# Altium PCB PCB1.PcbDoc
Units mm, origin at the board's own origin, x right, y up, seen from the top; angles counter-clockwise.
Board outline 99.82 x 77.22 mm, 2 copper layers (Top Layer, Bottom Layer); 41 components, 33 nets, 166 pads, 285 vias.
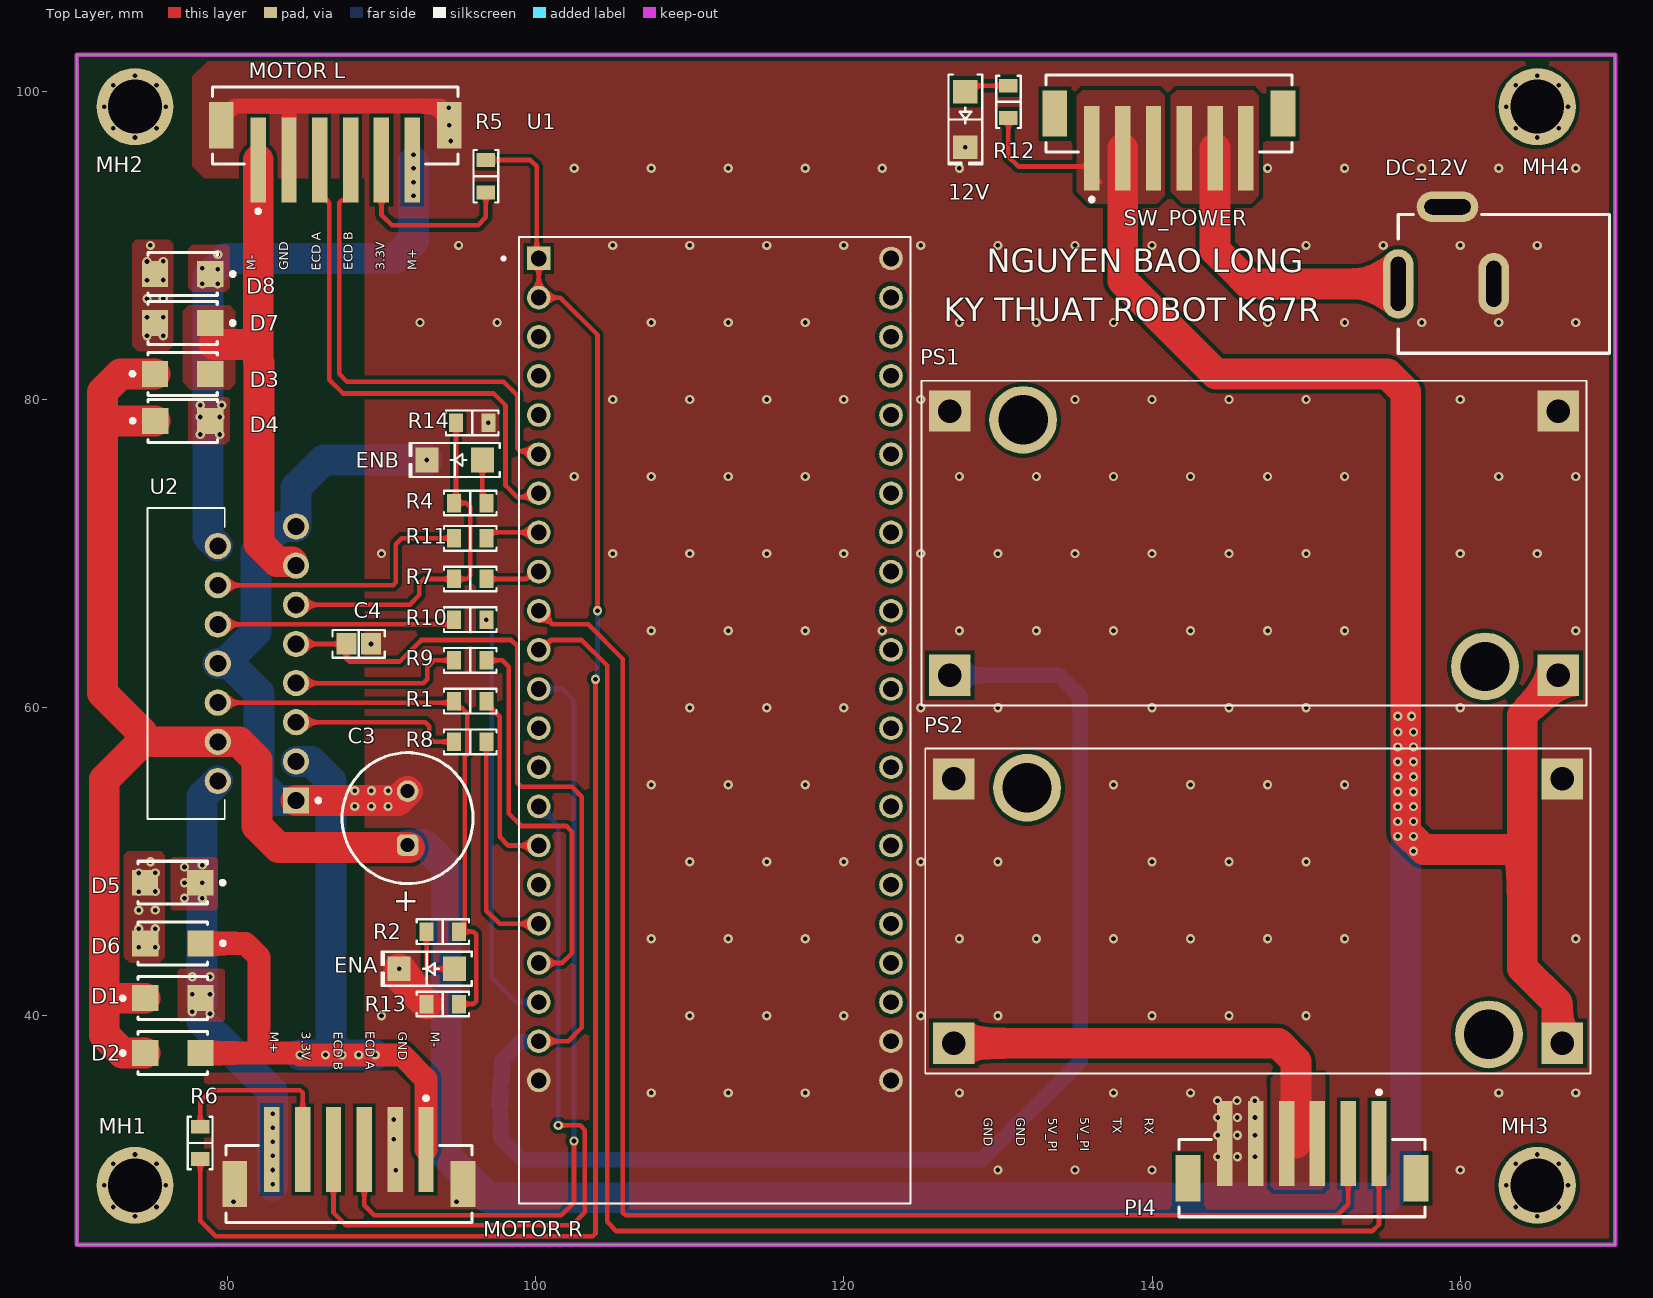
[diagram p0: Top Layer view]
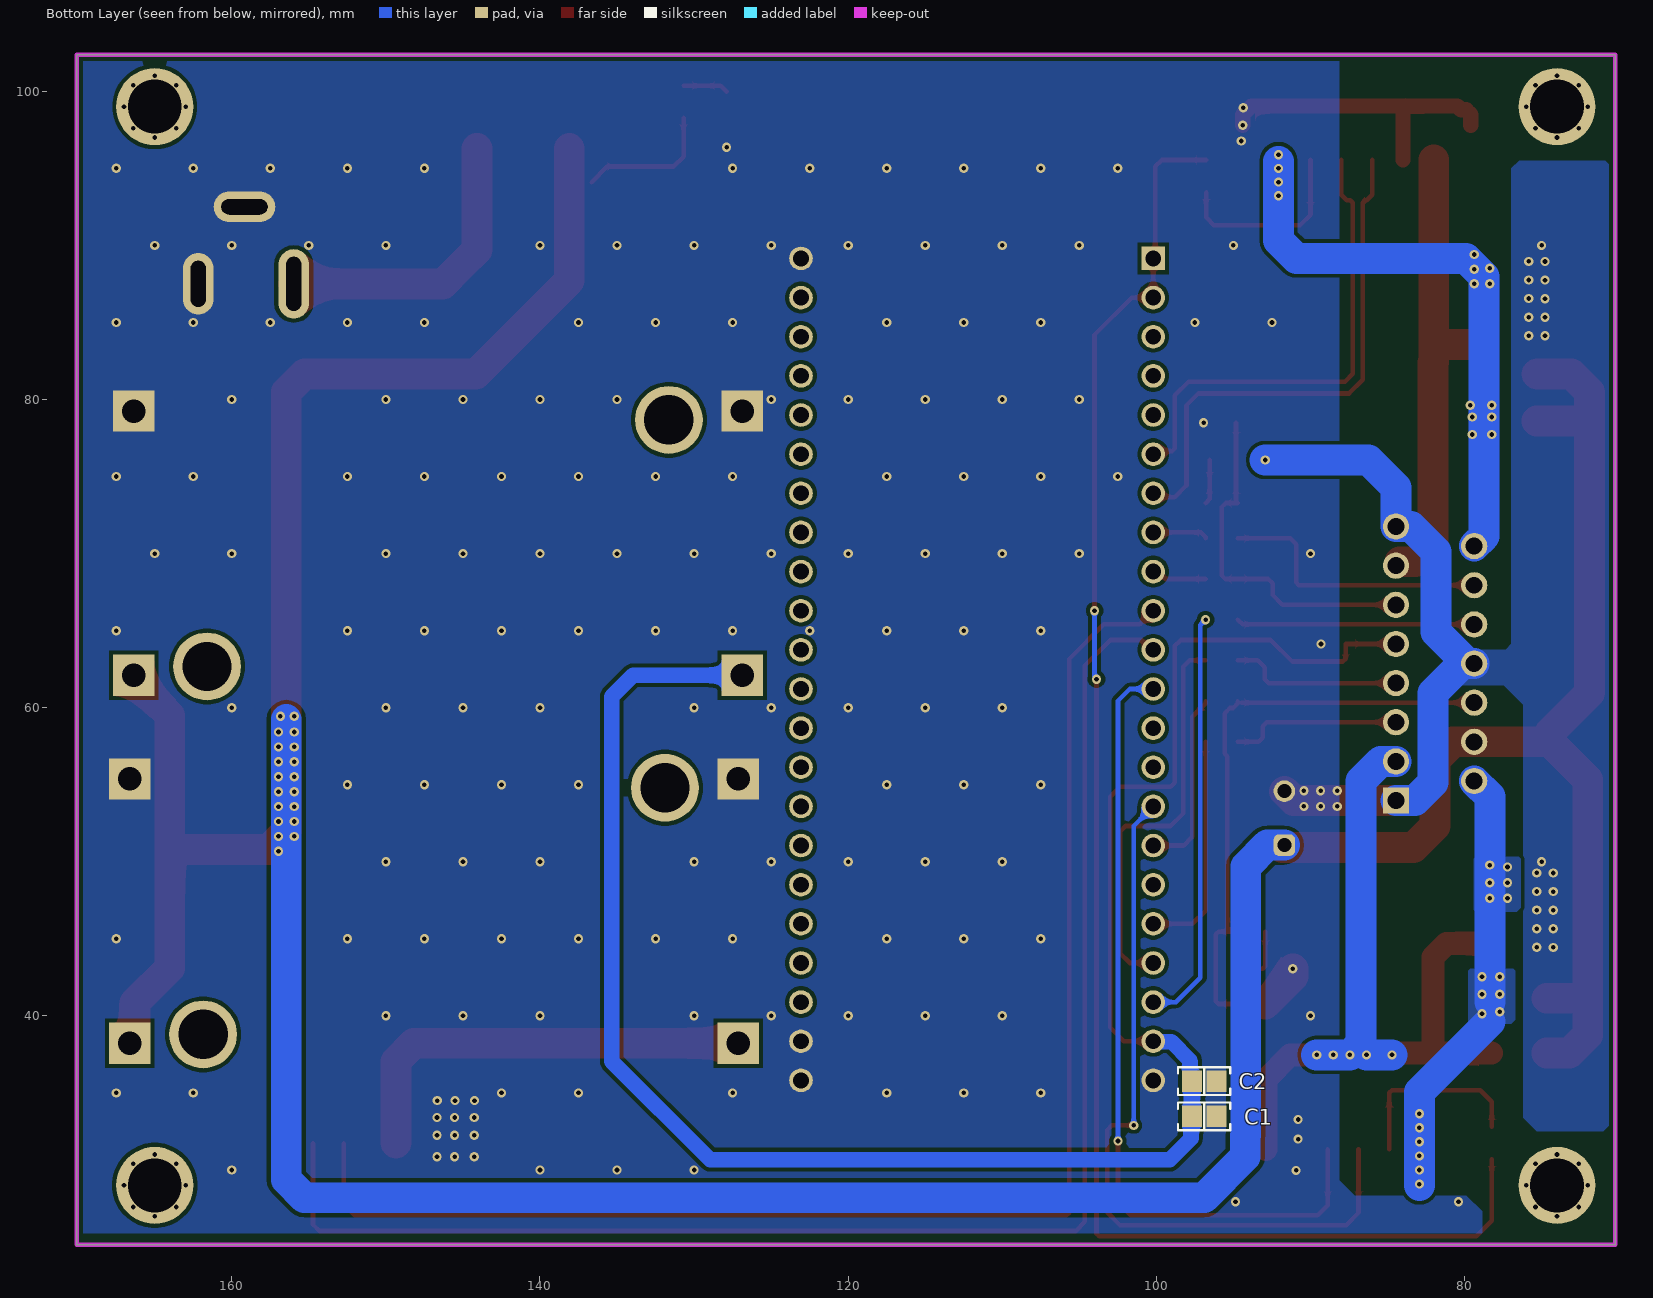
[diagram p1: Bottom Layer view, seen from below]
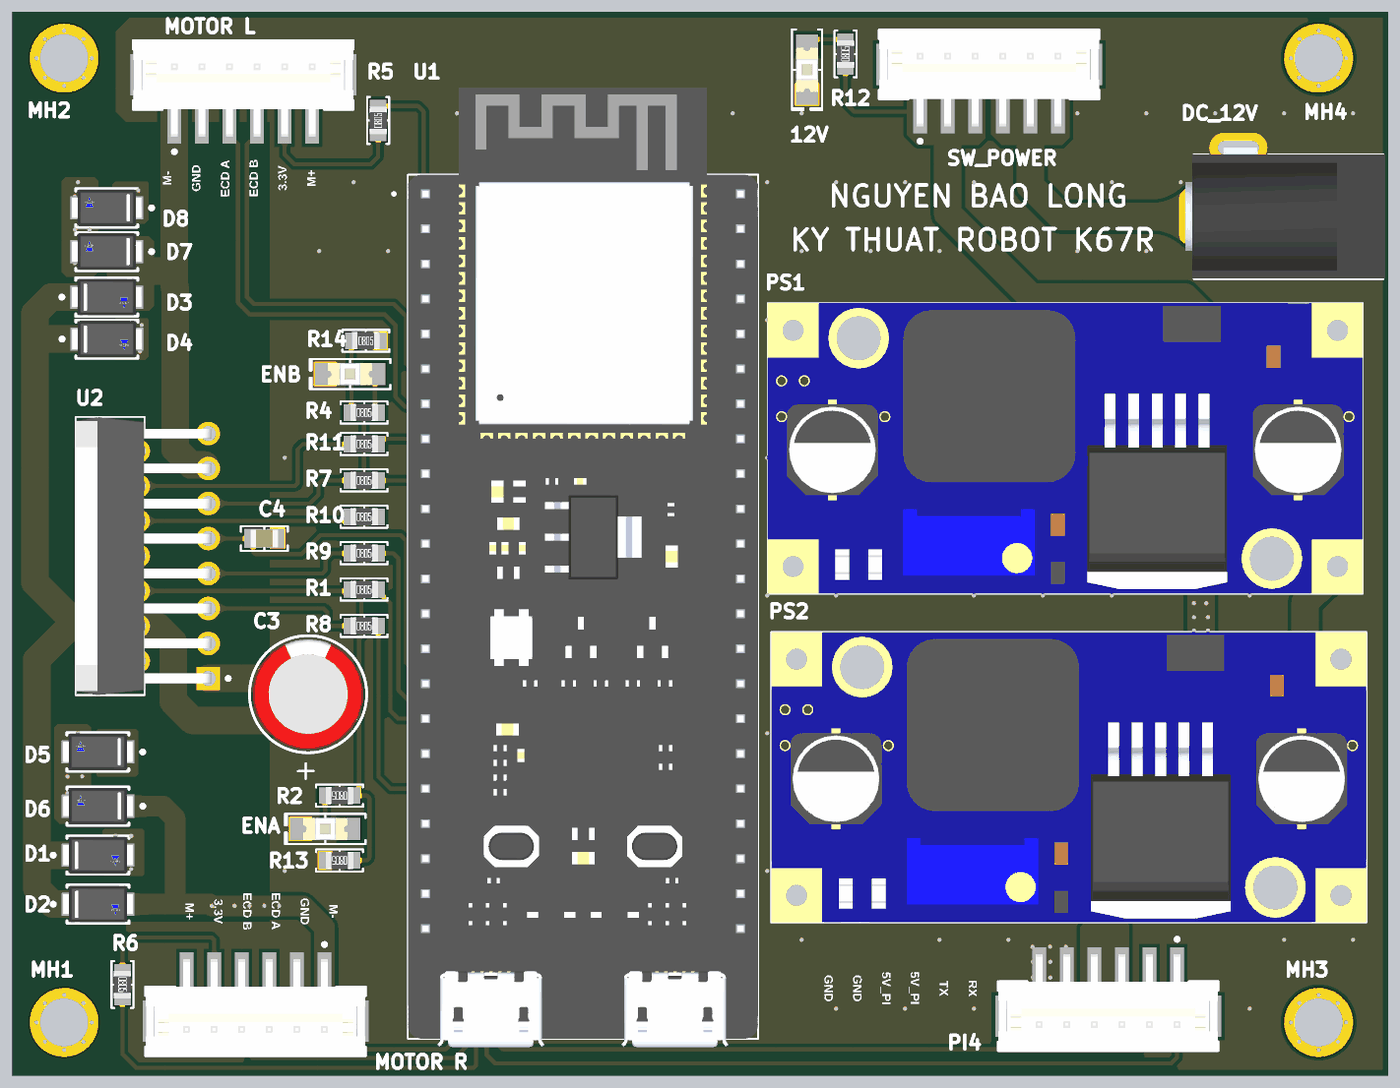
[diagram p2: 3D render of the assembled board from above, using the file's embedded part models]

## Layer stack, top to bottom
Top Solder: solder mask 0.0102, Solder Resist, Dk 3.5
Top Layer: signal copper 0.0356
Dielectric 1: dielectric 0.32, FR-4, Dk 4.8
Bottom Layer: signal copper 0.0356
Bottom Solder: solder mask 0.0102, Solder Resist, Dk 3.5

## Board outline
70.231,25.146 170.053,25.146 170.053,102.362 70.231,102.362

## Design rules (kind name [scope] priority, off if disabled: settings)
Clearance [All] p1: gap=0.254 ignorepadtopadclearanceinfootprint=FALSE
PolygonConnect [All] p1: connectstyle=Direct reliefconductorwidth=0.254 reliefentries=4 polygonreliefangle="90 Angle" airgapwidth=0.254
RoutingVias [All] p1: holewidth=0.711 width=1.27 viastyle="Through Hole" minholewidth=0.711 minwidth=1.27 maxholewidth=0.711 maxwidth=1.27
SolderMaskExpansion [All] p1: expansion=0.102 istentingtop=FALSE
SupplyNets "Schematic Supply Nets" [InNet('GND')] p1: voltage=0.000
Width [All] p1: maxlimit=2 minlimit=0.3 preferedwidth=0.5
30 further rules are at their usual default settings.

## Components (designator, comment, footprint, x,y, rotation, side; value= is the part's Value field where it differs from the comment)
12V "LED1206, Red" "LED 1206_3216 RED" 127.889,98.171 r270 top value=Red
C1 "1 µF" "CAP 0805_2012" 96.901,33.481 r0 bottom
C2 "1 µF" "CAP 0805_2012" 96.901,35.767 r0 bottom
C3 "870235174004" WCAP-PT5H_D8H11.5 91.694,52.832 r270 top
C4 "1 µF" "CAP 0805_2012" 88.519,64.135 r180 top
D1 "SS24SHE3_B/H" FP-95400-MFG 76.454,41.148 r0 top
D2 "SS24SHE3_B/H" FP-95400-MFG 76.454,37.592 r0 top
D3 "SS24SHE3_B/H" FP-95400-MFG 77.089,81.661 r0 top
D4 "SS24SHE3_B/H" FP-95400-MFG 77.101,78.613 r0 top
D5 "SS24SHE3_B/H" FP-95400-MFG 76.442,48.641 r180 top
D6 "SS24SHE3_B/H" FP-95400-MFG 76.454,44.704 r180 top
D7 "SS24SHE3_B/H" FP-95400-MFG 77.089,84.963 r180 top
D8 "SS24SHE3_B/H" FP-95400-MFG 77.089,88.138 r180 top
DC_12V "KLDX-0202-B" KYCN-KLDX-0202-B_V 169.679,87.503 r180 top
ENA "LED1206, Red" "LED 1206_3216 RED" 92.942,43.053 r180 top value=Red
ENB "LED1206, Red" "LED 1206_3216 RED" 94.742,76.073 r180 top value=Red
MH1 "Mounting Holes" "M3 (Small Vias)" 74,29 r0 top
MH2 "Mounting Holes" "M3 (Small Vias)" 74,99 r0 top
MH3 "Mounting Holes" "M3 (Small Vias)" 165,29 r0 top
MH4 "Mounting Holes" "M3 (Small Vias)" 165,99 r0 top
"MOTOR L" "B6B-PH-SM4-TBT(LF)(SN)" FP-B6B-PH-SM4-TBT_LF_SN-MFG 86.995,97.79 r0 top
"MOTOR R" "B6B-PH-SM4-TBT(LF)(SN)" FP-B6B-PH-SM4-TBT_LF_SN-MFG 87.884,29.083 r180 top
PI4 "B6B-PH-SM4-TBT(LF)(SN)" FP-B6B-PH-SM4-TBT_LF_SN-MFG 149.733,29.464 r180 top
PS1 "MC00100" CONV_MC00100 146.621,70.675 r180 top
PS2 "MC00100" CONV_MC00100 146.875,46.799 r180 top
R1 "0R, 0805" "YAGEO RES 0805_2012" 95.758,60.427 r0 top
R2 "3.3K, 0805" "YAGEO RES 0805_2012" 93.98,45.466 r180 top
R4 "3.3K, 0805" "YAGEO RES 0805_2012" 95.758,73.279 r0 top
R5 "0R, 0805" "YAGEO RES 0805_2012" 96.774,94.488 r90 top
R6 "0R, 0805" "YAGEO RES 0805_2012" 78.232,31.75 r270 top
R7 "0R, 0805" "YAGEO RES 0805_2012" 95.758,68.351 r0 top
R8 "0R, 0805" "YAGEO RES 0805_2012" 95.758,57.785 r0 top
R9 "0R, 0805" "YAGEO RES 0805_2012" 95.758,63.068 r0 top
R10 "0R, 0805" "YAGEO RES 0805_2012" 95.758,65.71 r0 top
R11 "0R, 0805" "YAGEO RES 0805_2012" 95.758,70.993 r0 top
R12 "3.3K, 0805" "YAGEO RES 0805_2012" 130.683,99.314 r90 top
R13 "10K, 0805" "YAGEO RES 0805_2012" 93.98,40.767 r180 top
R14 "10K, 0805" "YAGEO RES 0805_2012" 95.885,78.486 r0 top
SW_POWER "B6B-PH-SM4-TBT(LF)(SN)" FP-B6B-PH-SM4-TBT_LF_SN-MFG 141.097,98.552 r0 top
U1 "ESP32-S3-DEVKITC-1-N8R2" XCVR_ESP32-S3-DEVKITC-1-N8R2 111.633,59.182 r0 top
U2 "L298N" L298N_MFG 77.325,62.865 r90 top

## Footprints (in the part's own frame and the unit in brackets; to place one, negate y for a bottom-side part, rotate by r counter-clockwise, add the part's x,y. Pads: shape width x height; smd on the part's side, far side on the other; paste and mask are expansions set on the pad)
"CAP 0805_2012" [mm]
  rect 1.3x1.4 smd: 1(-0.8,0) 2(0.8,0)
  silkscreen extent -1.7,-0.9 1.7,0.9, body extent -1,-0.64 1,0.64, height 1.26
CONV_MC00100 [mil]
  rect 105.63x105.63 / inner round 105.63 / far side rect 105.63x105.63 hole 60 mask+4.02: IN+(-777.5,337.5) IN-(-777.5,-337.5) OUT+(777.5,337.5) OUT-(777.5,-337.5)
  round 173.23 hole 125.98 mask+4.02: MH1(-590,315) MH2(590,-315)
  silkscreen extent -850,-415 850,415, body extent -850,-415 850,415, height 551
FP-95400-MFG [mm]
  rect 1.7x1.68 smd paste+0 mask+0: 1(-1.79,0) 2(1.79,0)
  silkscreen extent -3.37,-1.4 2.25,1.4, body extent -2.74,-1.5 2.74,1.5, height 0.25
FP-B6B-PH-SM4-TBT_LF_SN-MFG [mm]
  rect 1x5.5 smd paste+0 mask+0: 1(-5,-2.25) 2(-3,-2.25) 3(-1,-2.25) 4(1,-2.25) 5(3,-2.25) 6(5,-2.25)
  rect 1.6x3 smd paste+0 mask+0: 7(-7.4,0) 8(7.4,0)
  silkscreen extent -7.98,-5.7 7.98,2.5, body extent -7.98,-4.5 7.98,2.5, height 6.6
KYCN-KLDX-0202-B_V [mm] "3 Conductor Jack, 9 x 14.5 mm Body"
  oval 2x4.5 hole 1 slot 3.5 at 90 deg: 1(13.7,0)
  oval 2x4 hole 1 slot 3 at 90 deg: 2(7.5,0)
  oval 4x2 hole 1 slot 3 at 0 deg: 3(10.5,-5)
  silkscreen extent 0,-4.5 13.7,4.5, body extent -0.15,-5 14.35,4.5, height 11
L298N_MFG [mm] "Recommended Land Pattern"
  rect 1.7x1.7 hole 1.1 paste-2539.97 mask+0: 1(-8.89,-7.13)
  round 1.7 hole 1.1 paste-2539.97 mask+0: 2(-7.62,-2.05) 3(-6.35,-7.13) 4(-5.08,-2.05) 5(-3.81,-7.13) 6(-2.54,-2.05) 7(-1.27,-7.13) 8(0,-2.05) 9(1.27,-7.13) 10(2.54,-2.05) 11(3.81,-7.13) 12(5.08,-2.05) 13(6.35,-7.13) 14(7.62,-2.05) 15(8.89,-7.13)
  silkscreen extent -10.1,-8.7 10.1,2.5, body extent -10.1,-7.39 10.1,2.5, height 21
"LED 1206_3216 RED" [mm]
  rect 1.5x1.6 smd: 1(-1.8,0) 2(1.8,0)
  silkscreen extent -2.92,-1.1 2.92,1.1, body extent -1.6,-0.8 1.6,0.8, height 0.9
"M3 (Small Vias)" [mm]
  round 5 hole 3.5: 1(0,0)
WCAP-PT5H_D8H11.5 [mm] "Aluminum Polymer Capacitors, body Diameter 8mm"
  rrect50% 1.4x1.4 hole 0.9: 1(1.75,0)
  round 1.4 hole 0.9: 2(-1.75,0)
  silkscreen extent -4.25,-4.25 4.25,4.25, body extent -3.99,-4 4,4, height 11.81
XCVR_ESP32-S3-DEVKITC-1-N8R2 [mm]
  rect 1.53x1.53 / inner round 1.53 / far side rect 1.53x1.53 hole 1.02: J1_1(-11.43,29.97)
  round 1.53 hole 1.02: J1_2(-11.43,27.43) J1_3(-11.43,24.89) J1_4(-11.43,22.35) J1_5(-11.43,19.81) J1_6(-11.43,17.27) J1_7(-11.43,14.73) J1_8(-11.43,12.19) J1_9(-11.43,9.65) J1_10(-11.43,7.11) J1_11(-11.43,4.57) J1_12(-11.43,2.03) J1_13(-11.43,-0.51) J1_14(-11.43,-3.05) J1_15(-11.43,-5.59) J1_16(-11.43,-8.13) J1_17(-11.43,-10.67) J1_18(-11.43,-13.21) J1_19(-11.43,-15.75) J1_20(-11.43,-18.29) J1_21(-11.43,-20.83) J1_22(-11.43,-23.37) J3_1(11.43,29.97) J3_2(11.43,27.43) J3_3(11.43,24.89) J3_4(11.43,22.35) J3_5(11.43,19.81) J3_6(11.43,17.27) J3_7(11.43,14.73) J3_8(11.43,12.19) J3_9(11.43,9.65) J3_10(11.43,7.11) J3_11(11.43,4.57) J3_12(11.43,2.03) J3_13(11.43,-0.51) J3_14(11.43,-3.05) J3_15(11.43,-5.59) J3_16(11.43,-8.13) J3_17(11.43,-10.67) J3_18(11.43,-13.21) J3_19(11.43,-15.75) J3_20(11.43,-18.29) J3_21(11.43,-20.83) J3_22(11.43,-23.37)
  silkscreen extent -13.82,-31.37 12.7,31.37, body extent -12.7,-31.96 12.7,37.68, height 7.39
"YAGEO RES 0805_2012" [mm]
  rect 0.9x1.2 smd: 1(-1.05,0) 2(1.05,0)
  silkscreen extent -1.7,-0.8 1.7,0.8, body extent -1,-0.62 1,0.63, height 0.6

## Part data
12V ENA ENB: library part 5990210007F, "LED RED 1206 SMD", Color=Red, Current - Test=20mA, Device Package="1206 (3216 Metric)", Lens Color=0.80mm, Manufacturer=Dialight, Millicandela Rating=29mcd, Supplier Device Package=1206, Supplier Part Number 1=350-4360-1-ND, Voltage - Forward (Vf) (Typ)=2.1V, ComponentLink1Description=Datasheet, ComponentLink1URL=http://www.dialightsignalsandcomponents.com/Assets/Brochures_And_Catalogs/Indication/CBI_SMD_new/Dialight_CBI_data_599-1206_Apr2018.pdf, componentlink2description="DigiKey Link", ComponentLink2URL=https://www.digikey.com/en/products/detail/dialight/5990210007F/9385415, Configuration=Standard, Height (Max)=0.80mm, lastupdated="6/3/2024 8:00:41 PM", Lens Size="2.00mm x 1.60mm", Lens Style="Rectangle with Flat Top", Lifecycle Status=Active, Minimum Order=1, Mounting Type="Surface Mount", Package / Case="1206 (3216 Metric)", Packaging=TapeAndReel, Part Number=5990210007F, Part Status=Active, partid=188, Price=0.04, Series=599, Size / Dimension="3.20mm L x 1.60mm W", Supplier 1=DigiKey, Viewing Angle=140°, Wavelength - Dominant=633nm
C1 C2 C4: library part CC0805KKX7R9BB105, "CAP CER 1UF 50V X7R 0805", Capacitance="1 µF, 0805", Device Package="0805 (2012 Metric)", Manufacturer=Yageo, Operating Temperature="-55°C ~ 125°C", Supplier Part Number 1=311-1886-1-ND, Temperature Coefficient=X7R, Tolerance=±10%, Voltage - Rated=50V, Applications="General Purpose", ComponentLink1Description=Datasheet, ComponentLink1URL=https://www.yageo.com/upload/media/product/productsearch/datasheet/mlcc/UPY-GPHC_X7R_6.3V-to-50V_18.pdf, componentlink2description="DigiKey Link", ComponentLink2URL=https://www.digikey.com/en/products/detail/yageo/CC0805KKX7R9BB105/5195292, lastupdated="2/9/2024 8:15:50 PM", Lifecycle Status=Active, Minimum Order=1, Mounting Type="Surface Mount, MLCC", Package / Case="0805 (2012 Metric)", Packaging=TapeAndReel, Part Number=CC0805KKX7R9BB105, Part Status=Active, partid=9887, Price=0.03, Series=CC, Size / Dimension="0.079\" L x 0.049\" W (2.00mm x 1.25mm)", Supplier 1=DigiKey, Thickness (Max)="0.057\" (1.45mm)"
C3: library part CMP-03913-54202634-2, "WCAP-PT5H Aluminum Polymer Capacitors", Capacitance=680µF, Case/Package=Radial, ESR (Equivalent Series Resistance)=7mΩ, Leakage Current=428µA, Manufacturer Lifecycle Status=ACTIVE, Max Operating Temperature=105°C, Min Operating Temperature=-55°C, Ripple Current=6.1A, Tolerance=20%, Voltage Rating=6.3V, Diameter=8mm, Height - Seated (Max)=13.0048mm, Lead Pitch=3.5052mm, Length=11.5mm, Life (Hours)=5000hours, Lifecycle Status=Production, Mount="Through Hole", Packaging="Tape & Box (TB)", Pitch=3.5mm, Polarity=Polar, REACH SVHC=Unknown, RoHS=Compliant, Voltage Rating (DC)=6.3V, YEOL="1 = Estimated lifetime > 10 years"
D1 D2 D3 D4 D5 D6 D7 D8: library part CMP-02539-000047-1, "DIODE SCHOTTKY 2A 40V DO-214AC", RoHS Compliant=Yes
DC_12V: library part CMP-0256-00001-1, "3 Conductor Power Jack, 2 break 2 aux contacts", ComponentLink1Description="Manufacturer URL", ComponentLink1URL=http://kycon.com/, componentlink2description=Datasheet, ComponentLink2URL=http://anacapa.kycon.com/Catalog_PDF/KLDX_0202.pdf, Contact Finish=Brass, Mounting Technology="Through Hole", PackageDescription="Jack, 9 x 14.5 mm Body, 2.5 mm Center Pin Diameter", PackageReference=KLDX-0202-B, PartNumber=KLDX-0202-B
"MOTOR L" "MOTOR R" PI4 SW_POWER: library part CMP-17439-000069-1, "CONN HEADER SMD 6POS 2MM", Manufacturer=JST, Lead Free="Lead Free", Manufacturer Part Number=B6B-PH-SM4-TBT(LF)(SN), Mount="Surface Mount", Number of Positions=6, Pitch=2mm, Termination=Crimp
PS1 PS2: "DC-DC LM2596 Step Down Adjustable Converter Power Supply Module 1.3V-35V", Package=None, Check_prices=https://www.snapeda.com/parts/MC00100/YKS/view-part/?ref=eda, MF=YKS, MP=MC00100, SnapEDA_Link=https://www.snapeda.com/parts/MC00100/YKS/view-part/?ref=snap
R1 R5 R6 R7 R8 R9 R10 R11: library part RC0805FR-07470RL_3, "RES 0 OHM 1% 1/8W 0805", Device Package="0805 (2012 Metric)", Manufacturer=Yageo, Operating Temperature="-55°C ~ 155°C", Part Number=RC0805FR-07470RL, Power (Watts)="0.125W, 1/8W", Resistance="470 Ohms", Supplier Device Package=0805, Supplier Part Number 1=311-470CRCT-ND, Temperature Coefficient=±100ppm/°C, Tolerance=±1%, ComponentLink1Description=Datasheet, ComponentLink1URL=https://www.yageo.com/upload/media/product/productsearch/datasheet/rchip/PYu-RC_Group_51_RoHS_L_10.pdf, componentlink2description="DigiKey Link", ComponentLink2URL=https://www.digikey.com/en/products/detail/yageo/RC0805FR-07470RL/727976, Composition="Thick Film", Features="Moisture Resistant", Height - Seated (Max)="0.024\" (0.60mm)", lastupdated="7/25/2024 9:20:22 AM", Lifecycle Status=Active, Minimum Order=1, Number of Terminations=2, Package / Case="0805 (2012 Metric)", Packaging=TapeAndReel, Part Status=Active, partid=39406, Price=0.01, Series=RC_L, Size / Dimension="0.079\" L x 0.049\" W (2.00mm x 1.25mm)", Supplier 1=DigiKey
R2 R4 R12 R13 R14: library part RC0805FR-07470RL, "RES 470 OHM 1% 1/8W 0805", Device Package="0805 (2012 Metric)", Manufacturer=Yageo, Operating Temperature="-55°C ~ 155°C", Power (Watts)="0.125W, 1/8W", Resistance="470 Ohms", Supplier Device Package=0805, Supplier Part Number 1=311-470CRCT-ND, Temperature Coefficient=±100ppm/°C, Tolerance=±1%, ComponentLink1Description=Datasheet, ComponentLink1URL=https://www.yageo.com/upload/media/product/productsearch/datasheet/rchip/PYu-RC_Group_51_RoHS_L_10.pdf, componentlink2description="DigiKey Link", ComponentLink2URL=https://www.digikey.com/en/products/detail/yageo/RC0805FR-07470RL/727976, Composition="Thick Film", Features="Moisture Resistant", Height - Seated (Max)="0.024\" (0.60mm)", lastupdated="7/25/2024 9:20:22 AM", Lifecycle Status=Active, Minimum Order=1, Number of Terminations=2, Package / Case="0805 (2012 Metric)", Packaging=TapeAndReel, Part Number=RC0805FR-07470RL, Part Status=Active, partid=39406, Price=0.01, Series=RC_L, Size / Dimension="0.079\" L x 0.049\" W (2.00mm x 1.25mm)", Supplier 1=DigiKey
U1: "WiFi Development Tools - 802.11 (Engineering Samples Only) ESP32-S3 General-Purpose Development Board, ESP32-S3-WROOM-1-N8R2, with Pin Header", Package=None, Check_prices=https://www.snapeda.com/parts/ESP32-S3-DEVKITC-1-N8R2/Espressif+Systems/view-part/?ref=eda, MF="Espressif Systems", MP=ESP32-S3-DEVKITC-1-N8R2, SnapEDA_Link=https://www.snapeda.com/parts/ESP32-S3-DEVKITC-1-N8R2/Espressif+Systems/view-part/?ref=snap
U2: library part CMP-2000-06526-2, "Motor Driver, DC Brush, Full Bridge, 4 Outputs, 4.8V to 46V Supply, 2A Out, Multiwatt-15", Collector Emitter Voltage (VCEO)=46V, Drain to Source Resistance=930mΩ, Max Collector Current=3A, Max Operating Temperature=150°C, Max Output Current=4A, Max Supply Voltage=7V, Min Operating Temperature=-40°C, Min Supply Voltage=4.5V, Min Supply Voltage (DC)=4.8V, Operating Supply Current=13mA, Operating Supply Voltage=5V, Output Current=2A, Quiescent Current=500mA, China RoHS=Non-Compliant, ComponentLink1Description="Manufacturer's Website", ComponentLink1URL=http://www.st.com, componentlink2description="Datasheet URL", ComponentLink2URL=https://www.st.com/content/ccc/resource/technical/document/datasheet/82/cc/3f/39/0a/29/4d/f0/CD00000240.pdf/files/CD00000240.pdf/jcr:content/translations/en.CD00000240.pdf, Height=10.7mm, Height - Seated (Max)=21mm, HelpURL=https://www.st.com/content/ccc/resource/technical/document/datasheet/82/cc/3f/39/0a/29/4d/f0/CD00000240.pdf/files/CD00000240.pdf/jcr:content/translations/en.CD00000240.pdf, Interface=Parallel, Lead Free="Lead Free", Length=19.6mm, Lifecycle Status=Production, Motor Type=Brushed, Mount="Through Hole", Number of Channels=2, Number of Circuits=2, Number of Drivers=2, Number of Outputs=4, Number of Pins=13, Number of Terminals=15, Number of Transmitters=2, Output Current per Channel=2A, Output Voltage=46V, Radiation Hardening=No, REACH SVHC=No, RoHS=Compliant, Schedule B="8542390000, 8542390000", Terminal Pitch=1.27mm, Width=5mm

## Via types
v1: diameter 0.6, hole 0.3, Top Layer to Bottom Layer, tented both sides, 253 vias
v2: diameter 0.3, hole 0.3, Top Layer to Bottom Layer, 32 vias

## Nets (pads, with @x,y where several pads share a name; then routed paths per layer and width w, separated by ;. In a path a pad name is that pad's centre, name@x,y a point inside that pad or via, vN(x,y) a via of type N, cw(c..) or ccw(c..) an arc to the next point about the centre after c; other vN are vias at no path point)
3.3V_MCU: R5.2 R6.2 U1.J1_1 U1.J1_2 | length 105.4
  Top Layer w0.3: R6.2 78.232,26.716 79.248,25.7 103.71,25.7 103.886,25.876 v1(103.886,61.849) ; R5.2 99.661,95.538 100.076,95.123 100.076,89.279 U1.J1_1 U1.J1_2 101.602,86.612 104.013,84.201 v1(104.013,66.294)
  Bottom Layer w0.3: v1(103.886,61.849) 103.886,61.93 104.013,62.057 v1(104.013,66.294)
5V_MCU: C1.2 C2.2 C4.2 PS1.OUT+ U1.J1_21 U2.9 | length 129.2
  Top Layer w0.3: U2.9 C4.2@87.668,64.135 ; C4.2 87.719,63.173 87.895,62.997 91.191,62.997 92.583,64.389 98.425,64.389 98.806,64.008 98.806,55.118 99.06,54.864 102.362,54.864 102.997,54.229 102.997,39.243 102.106,38.352 U1.J1_21
  Bottom Layer w1: U1.J1_21 100.174,38.323 99.029,38.323 97.823,37.117 97.823,35.889 C2.2 C1.2 97.743,33.439 97.743,32.051 99.129,30.665 128.963,30.665 135.344,37.046 135.344,60.716 133.956,62.103 PS1.OUT+
5V_PI: PI4.3 PI4.4 PS2.OUT+ | length 28
  Top Layer w2: PS2.OUT+ 148.18,38.227 149.352,37.055 149.352,31.75
ENA: R1.1 R2.1 R13.1 U2.6 | length 37.6
  Top Layer w0.3: U2.6 R1.1@94.488,60.325 ; R1.1 94.708,60.277 95.008,59.977 95.224,59.977 95.562,59.639 95.562,57.018 95.4,56.856 95.4,45.616 95.18,45.616 R2.1 95.963,45.466 96.139,45.29 96.139,40.943 95.963,40.767 R13.1
ENB: R4.1 R7.1 R14.1 U2.11 | length 23.4
  Top Layer w0.3: U2.11 91.821,66.675 92.456,67.31 92.456,68.072 92.735,68.351 R7.1 95.529,68.351 95.758,68.58 95.758,73.025 95.504,73.279 R4.1 94.835,73.406 R14.1
GND: 12V.2 "MOTOR L.2" "MOTOR L.7" "MOTOR L.8" "MOTOR R.2" "MOTOR R.7" "MOTOR R.8" C1.1 C2.1 C3.2 C4.1 D5.2 D6.2 D7.2 D8.2 DC_12V.2 DC_12V.3 ENA.2 ENB.2 PI4.5 PI4.6 PS1.IN- PS1.OUT- PS2.IN- PS2.OUT- R13.2 R14.2 U1.J1_22 U1.J3_1 U1.J3_21 U1.J3_22 U2.1 U2.8 U2.15 | length 66.5
  Top Layer w1: 79.595,97.79 79.595,98.49 79.895,98.79 80.222,98.79 80.476,99.044 83.82,99.044 ; 83.995,95.54 83.995,98.869 83.82,99.044 ; v1(94.395,97.79) 94.395,98.49 93.841,99.044 83.82,99.044
  Top Layer w2: U2.1 91.087,53.975 C3.2 ; v1(91.142,43.053) 91.142,42.555 R13.2
  Bottom Layer w2: U2.1 83.214,53.975 82.042,55.147 82.042,60.96 80.137,62.865 U2.8 79.811,62.865 81.857,64.912 81.857,70.144 83.468,71.755 U2.15 84.455,74.295 86.233,76.073 v1(92.942,76.073)
  other v1: 80.391,27.94 94.869,27.94 90.932,29.972 130,30 135,30 140,30 160,30 144.272,30.861 145.542,30.861 146.685,30.861 90.805,32.004 144.272,32.258 145.542,32.258 146.685,32.258 90.805,33.274 144.272,33.401 145.542,33.401 146.685,33.401 144.249,34.501 145.519,34.501 146.662,34.501 107.5,35 112.5,35 117.5,35 127.5,35 137.5,35 142.5,35 162.5,35 167.5,35 90,40 110,40 115,40 120,40 125,40 130,40 140,40 145,40 150,40 74.246,44.443 75.311,44.45 107.5,45 112.5,45 117.5,45 127.5,45 132.5,45 137.5,45 142.5,45 147.5,45 152.5,45 167.5,45 74.246,45.65 75.311,45.657 74.246,46.856 75.311,46.863 74.246,48.063 75.311,48.069 74.246,49.269 75.311,49.276 75,50 110,50 115,50 120,50 125,50 130,50 140,50 145,50 150,50 88.265,53.594 89.344,53.594 90.424,53.594 88.265,54.61 89.344,54.61 90.424,54.61 107.5,55 112.5,55 117.5,55 137.5,55 142.5,55 147.5,55 152.5,55 110,60 115,60 120,60 125,60 130,60 140,60 145,60 150,60 160,60 89.319,64.135 107.5,65 112.5,65 117.5,65 122.5,65 127.5,65 132.5,65 137.5,65 142.5,65 147.5,65 152.5,65 167.5,65 90,70 105,70 110,70 115,70 120,70 125,70 130,70 135,70 140,70 145,70 150,70 160,70 165,70 102.5,75 107.5,75 112.5,75 117.5,75 127.5,75 132.5,75 137.5,75 142.5,75 147.5,75 152.5,75 162.5,75 167.5,75 96.935,78.486 105,80 110,80 115,80 120,80 125,80 135,80 140,80 145,80 150,80 160,80 74.778,84.13 75.843,84.137 92.5,85 97.5,85 107.5,85 112.5,85 117.5,85 127.5,85 132.5,85 137.5,85 147.5,85 152.5,85 157.5,85 162.5,85 167.5,85 74.778,85.336 75.843,85.343 74.778,86.543 75.843,86.55 74.778,87.749 75.843,87.756 74.778,88.956 75.843,88.963 75,90 95,90 105,90 110,90 115,90 120,90 125,90 130,90 135,90 140,90 150,90 155,90 160,90 165,90 102.5,95 107.5,95 112.5,95 117.5,95 122.5,95 127.5,95 147.5,95 152.5,95 157.5,95 162.5,95 167.5,95 127.889,96.371 94.488,96.774 94.361,98.933
INPUT1: R8.1 U2.5 | length 11.2
  Top Layer w0.3: U2.5 92.837,59.055 93.091,58.801 93.091,58.039 93.345,57.785 R8.1
INPUT2: R9.1 U2.7 | length 11.3
  Top Layer w0.3: U2.7 92.71,61.595 92.964,61.849 92.964,62.611 93.421,63.068 R9.1
INPUT3: R10.1 U2.10 | length 15.5
  Top Layer w0.3: U2.10 94.408,65.405 94.708,65.705 R10.1
INPUT4: R11.1 U2.12 | length 18.1
  Top Layer w0.3: U2.12 90.756,67.945 90.932,68.121 90.932,70.612 91.313,70.993 R11.1
L_ENCODER_A: "MOTOR L.3" U1.J1_7 | length 34.5
  Top Layer w0.3: 85.995,95.54 85.995,93.29 86.345,92.94 86.438,92.94 86.614,92.764 86.614,81.28 87.503,80.391 97.282,80.391 98.044,79.629 98.044,74.422 98.809,73.657 99.057,73.657 99.077,73.677 99.968,73.677 U1.J1_7
L_ENCODER_B: "MOTOR L.4" U1.J1_6 | length 31.4
  Top Layer w0.3: 87.995,95.54 87.995,93.29 87.645,92.94 87.425,92.94 87.249,92.764 87.249,81.661 87.757,81.153 97.917,81.153 98.806,80.264 98.806,76.835 98.988,76.653 100.002,76.653 U1.J1_6
Net12V_1: 12V.1 R12.2 | length 3
  Top Layer w0.3: 12V.1 128.282,100.364 R12.2
NetENA_1: ENA.1 R2.2 | length 4.1
  Top Layer w0.3: R2.2 92.93,43.229 93.106,43.053 ENA.1
NetENB_1: ENB.1 R4.2 | length 2.9
  Top Layer w0.3: ENB.1 96.542,73.545 R4.2
"NetMOTOR L_5": "MOTOR L.5" R5.1 | length 12.4
  Top Layer w0.3: 89.995,95.54 89.995,91.996 90.678,91.313 96.266,91.313 96.774,91.821 R5.1
"NetMOTOR R_5": "MOTOR R.5" R6.1 | length 12.3
  Top Layer w0.3: R6.1 78.232,34.417 78.994,35.179 84.708,35.179 84.884,35.003 84.884,31.333
NetR1_2: R1.2 U1.J1_16 | length 11.9
  Top Layer w0.3: R1.2 96.808,60.277 97.662,59.423 97.662,51.612 98.222,51.052 U1.J1_16
NetR7_2: R7.2 U1.J1_9 | length 3.6
  Top Layer w0.3: R7.2 99.39,68.351 99.87,68.832 U1.J1_9
NetR8_2: R8.2 U1.J1_18 | length 14.7
  Top Layer w0.3: R8.2 96.808,46.829 97.665,45.972 U1.J1_18
NetR9_2: R9.2 U1.J1_19 | length 26
  Top Layer w0.3: R9.2 97.841,63.068 98.252,62.657 98.252,53.132 99.06,52.324 101.981,52.324 102.362,51.943 102.362,44.069 101.727,43.434 100.205,43.434 U1.J1_19
NetR10_2: R10.2 U1.J1_20 | length 27.1
  Bottom Layer w0.3: v1(96.808,65.71) 97.155,65.363 97.155,42.467 98.73,40.892 U1.J1_20
NetR11_2: R11.2 U1.J1_8 | length 3.6
  Top Layer w0.3: R11.2 96.808,71.072 97.108,71.372 U1.J1_8
OUT1: "MOTOR R.6" D1.2 D5.1 U2.2 | length 27.3
  Bottom Layer w2: 78.359,39.624 82.931,35.052 v1(82.931,32.741) v1(82.931,31.826) v1(82.931,30.912) v1(82.931,29.997) v1(82.931,29.083) v1@82.931,28.995 ; 78.359,40.894 78.359,42.545 v1(78.359,47.625) v1(78.359,48.641) v1(78.359,49.784) 78.359,54.229 U2.2
  other v1: 82.931,33.655 78.867,40.132 77.724,40.259 77.724,41.402 78.867,41.402 77.724,42.545 78.867,42.545 77.216,47.625 77.216,48.641 77.216,49.657
OUT2: "MOTOR R.1" D2.2 D6.1 U2.3 | length 55
  Top Layer w1.5: D2.2 82.423,37.592 ; D6.1 81.163,44.704 82.042,43.825 82.042,37.973 82.423,37.592 ; v1@89.471,37.465 v1(88.519,37.465) v1(87.439,37.465) v1(86.36,37.465) v1(84.709,37.465) 84.582,37.592 82.423,37.592 ; v1(89.599,37.465) 91.313,37.465 92.884,35.894 92.884,31.333
  Bottom Layer w2: U2.3 85.442,56.515 86.711,55.246 86.711,38.193 v1(87.439,37.465) v1(88.519,37.465) v1(89.599,37.465) ; v1(84.709,37.465) v1(86.36,37.465)
OUT3: "MOTOR L.1" D3.2 D7.1 U2.13 | length 29.3
  Top Layer w2: 79.121,83.566 80.87,83.566 ; 81.995,95.54 81.995,82.441 82.042,82.394 82.042,70.641 83.214,69.469 U2.13@84.201,69.469
OUT4: "MOTOR L.6" D4.2 D8.1 U2.14 | length 37.2
  Bottom Layer w2: U2.14 78.74,71.12 78.74,87.982 79.912,89.154 90.903,89.154 92.075,90.326 92.075,92.202 v1(92.075,93.218) v1(92.075,94.107) v1(92.075,94.996) 92.075,95.464
  other v1: 78.232,77.724 79.502,77.724 78.232,78.867 79.502,78.867 78.232,79.629 79.629,79.629 78.359,87.503 79.375,87.503 79.375,88.456 78.359,88.519 79.375,89.408 92.075,95.885
R_ENCODER_A: "MOTOR R.3" U1.J1_12 | length 53
  Top Layer w0.3: 88.884,31.333 88.884,27.702 89.535,27.051 101.669,27.051 102.489,27.871 v1(102.489,31.877)
  Bottom Layer w0.3: U1.J1_12 101.729,61.212 102.489,60.452 v1(102.489,31.877)
R_ENCODER_B: "MOTOR R.4" U1.J1_15 | length 49.5
  Top Layer w0.3: 86.884,31.333 86.884,27.211 87.679,26.416 102.362,26.416 103.193,27.247 103.193,32.59 102.89,32.893 v1(101.473,32.893)
  Bottom Layer w0.3: U1.J1_15 101.473,52.322 v1(101.473,32.893)
UART_RX: PI4.1 U1.J1_11 | length 97.3
  Top Layer w0.3: U1.J1_11 100.357,63.752 100.994,64.389 102.997,64.389 104.648,62.738 104.648,26.63 105.243,26.035 154.305,26.035 154.733,26.463 PI4.1
UART_TX: PI4.2 U1.J1_10 | length 94.1
  Top Layer w0.3: U1.J1_10 101.09,65.405 103.418,65.405 105.664,63.159 105.664,27.227 105.84,27.051 152.019,27.051 152.733,27.765 PI4.2
VIN: DC_12V.1 SW_POWER.4 SW_POWER.5 SW_POWER.6 | length 19.4
  Top Layer w2: SW_POWER.5 144.097,89.71 145.162,88.645 146.304,87.503 DC_12V.1
VIN_12V: C3.1 D1.1 D2.1 D3.1 D4.1 PS1.IN+ PS2.IN+ R12.1 SW_POWER.1 SW_POWER.2 SW_POWER.3 U2.4 | length 297.3
  Top Layer w0.3: R12.1 130.683,95.758 131.318,95.123 135.636,95.123 136.652,94.107
  Top Layer w2: D2.1 73.181,37.592 72.009,38.764 72.009,41.275 ; D1.1 72.136,41.148 72.009,41.275 ; D3.1 73.054,81.661 71.882,80.489 71.882,78.359 ; D4.1 72.136,78.613 71.882,78.359 ; C3.1@91.821,50.927 83.312,50.927 81.915,52.324 81.915,56.613 80.743,57.785 U2.4 74.451,57.785 ; SW_POWER.2 138.097,87.709 144.145,81.661 155.292,81.661 156.464,80.489 156.464,51.972 157.636,50.8 163.52,50.8 164.028,50.292 ; PS1.IN+@166.497,61.976 166.243,61.976 166.028,61.761 166.028,61.507 164.028,59.507 164.028,50.292 ; PS2.IN+ 166.304,38.547 166.304,40.833 164.028,43.109 164.028,50.292 ; 71.882,78.359 71.882,60.96 74.451,58.391 74.451,57.785 ; 72.009,41.275 72.009,55.343 74.451,57.785
  Bottom Layer w2: C3.1 92.808,51.082 94.197,49.693 94.197,32.262 94.234,32.225 94.234,30.861 96.901,28.194 155.292,28.194 156.464,29.366 156.464,59.237
  other v1: 156.972,50.68 155.956,51.648 156.972,51.648 155.956,52.615 156.972,52.615 155.956,53.583 156.972,53.583 155.956,54.55 156.972,54.55 155.956,55.518 156.972,55.518 155.956,56.485 156.972,56.485 155.956,57.453 156.972,57.453 155.956,58.42 156.972,58.42 155.956,59.436 156.845,59.436
pads on no net: MH1.1 MH2.1 MH3.1 MH4.1 PI4.7 PI4.8 PS1.MH1 PS1.MH2 PS2.MH1 PS2.MH2 SW_POWER.7 SW_POWER.8 U1.J1_3 U1.J1_4 U1.J1_5 U1.J1_13 U1.J1_14 U1.J1_17 U1.J3_2 U1.J3_3 U1.J3_4 U1.J3_5 U1.J3_6 U1.J3_7 U1.J3_8 U1.J3_9 U1.J3_10 U1.J3_11 U1.J3_12 U1.J3_13 U1.J3_14 U1.J3_15 U1.J3_16 U1.J3_17 U1.J3_18 U1.J3_19 U1.J3_20
copper on no net:
  other v2: 74,27 165,27 72.6,27.6 75.4,27.6 163.6,27.6 166.4,27.6 72,29 76,29 163,29 167,29 72.6,30.4 75.4,30.4 163.6,30.4 166.4,30.4 74,31 165,31 74,97 165,97 72.6,97.6 75.4,97.6 163.6,97.6 166.4,97.6 72,99 76,99 163,99 167,99 72.6,100.4 75.4,100.4 163.6,100.4 166.4,100.4 74,101 165,101

## Polygon pours and split planes (outlines as drawn)
GND on Top Layer "GND_L01_P015" (solid, pour order 15): 170.053,102.362 170.307,102.108 170.307,25.4 78.613,25.4 78.359,25.654 78.486,25.781 78.486,36.322 88.9,36.322 88.9,94.361 78.486,94.361 77.724,95.123 77.724,100.965 78.867,102.108 170.089,102.108
GND on Top Layer "GND_L01_P014" (solid, pour order 14): 74.065,90.36 76.224,90.36 76.478,90.106 76.478,83.502 76.097,83.121 74.192,83.121 73.811,83.502 73.811,90.106
GND on Top Layer "GND_L01_P011" (solid, pour order 11): 73.533,50.673 75.692,50.673 75.946,50.419 75.946,43.815 75.565,43.434 73.66,43.434 73.279,43.815 73.279,50.419
GND on Top Layer "GND_L01_P010" (solid, pour order 10): 144.16,35.528 147.335,35.528 147.462,35.401 147.462,28.289 147.208,28.035 144.16,28.035 143.906,28.289 143.906,35.274
5V_PI on Top Layer "5V_PI_L01_P009" (solid, pour order 9): 147.955,36.195 151.13,36.195 151.257,36.068 151.257,28.956 151.003,28.702 147.955,28.702 147.701,28.956 147.701,35.941
VIN on Top Layer "VIN_L01_P008" (solid, pour order 8): 141.605,100.076 146.558,100.076 146.939,99.695 146.939,93.218 146.431,92.71 141.986,92.71 141.224,93.472 141.224,99.695
VIN_12V on Top Layer "VIN_12V_L01_P007" (solid, pour order 7): 135.509,100.076 140.462,100.076 140.843,99.695 140.843,93.218 140.335,92.71 135.89,92.71 135.128,93.472 135.128,99.695
OUT4 on Top Layer "OUT4_L01_P006" (solid, pour order 6): 77.724,80.137 80.01,80.137 80.137,80.01 80.137,77.343 79.883,77.089 77.724,77.089 77.47,77.343 77.47,79.883
OUT4 on Top Layer "OUT4_L01_P005" (solid, pour order 5): 77.724,90.043 80.01,90.043 80.137,89.916 80.137,87.249 79.883,86.995 77.724,86.995 77.47,87.249 77.47,89.789
OUT3 on Top Layer "OUT3_L01_P004" (solid, pour order 4): 77.47,86.106 80.137,86.106 80.518,85.725 80.518,81.026 80.137,80.645 77.597,80.645 77.089,81.153 77.089,85.725
OUT1 on Top Layer "OUT1_L01_P001" (solid, pour order 1): 76.894,43.052 79.688,43.052 79.815,42.925 79.815,39.75 79.688,39.623 76.894,39.623 76.767,39.75 76.767,42.925
OUT1 on Top Layer "OUT1_L01_P000" (solid, pour order 0): 76.454,50.292 79.248,50.292 79.375,50.165 79.375,46.99 79.248,46.863 76.454,46.863 76.327,46.99 76.327,50.165
GND on Bottom Layer "GND_L02_P013" (solid, pour order 13): 88.138,29.337 87.122,28.321 79.883,28.321 78.867,27.305 78.867,25.908 170.18,25.908 170.18,101.473 169.545,102.108 88.138,102.108
GND on Bottom Layer "GND_L02_P012" (solid, pour order 12): 70.867,95.504 76.454,95.504 76.962,94.996 76.962,64.135 77.343,63.754 80.899,63.754 80.899,61.722 80.645,61.468 79.883,61.468 77.47,61.468 76.2,60.198 76.2,33.401 75.311,32.512 70.992,32.512 70.233,33.273 70.367,95.005
OUT1 on Bottom Layer "OUT1_L02_P003" (solid, pour order 3): 76.491,50.321 79.285,50.321 79.412,50.194 79.412,46.892 79.285,46.765 76.618,46.765 76.364,47.019 76.364,50.194
OUT1 on Bottom Layer "OUT1_L02_P002" (solid, pour order 2): 76.835,43.053 79.629,43.053 79.756,42.926 79.756,39.624 79.629,39.497 76.962,39.497 76.708,39.751 76.708,42.926

## Keep-outs
Keep-Out Layer:
  the board outline again, w0.3

## Silkscreen, mask and mechanical layers (free items; w line width, h text height)
Top Overlay:
  text "M-" at 82.043,88.392 h1 r90
  text "GND" at 84.133,88.392 h1 r90
  text "ECD B" at 88.314,88.392 h1 r90
  text "3.3V" at 90.405,88.392 h1 r90
  text "M+" at 92.495,88.392 h1 r90
  text "ECD A" at 86.241,88.368 h1 r90
  text "NGUYEN BAO LONG" at 129.286,88.265 h1.52
  text "KY THUAT ROBOT K67R" at 126.492,85.09 h1.52
  text "ECD A" at 88.791,38.992 h1 r270
  text "M+" at 82.536,38.969 h1 r270
  text "3.3V" at 84.627,38.969 h1 r270
  text "ECD B" at 86.717,38.969 h1 r270
  text "GND" at 90.898,38.969 h1 r270
  text "M-" at 92.989,38.969 h1 r270
  text "5V_PI" at 135.146,33.404 h1 r270
  text "GND" at 128.891,33.381 h1 r270
  text "GND" at 130.982,33.381 h1 r270
  text "5V_PI" at 133.072,33.381 h1 r270
  text "TX" at 137.253,33.381 h1 r270
  text "RX" at 139.344,33.381 h1 r270

## Text inside footprints (layer, text, board x,y; h text height)
C3: Top Overlay "+" at 90.944,48.282 h1.5 r270
PS1: Mechanical 13 "OUT+" at 130.121,65.176 h1.27 r180; Mechanical 13 "OUT-" at 129.622,77.425 h1.27 r180; Mechanical 13 "IN-" at 167.622,77.425 h1.27 r180; Mechanical 13 "IN+" at 167.622,65.176 h1.27 r180
PS2: Mechanical 13 "OUT+" at 130.375,41.3 h1.27 r180; Mechanical 13 "OUT-" at 129.876,53.549 h1.27 r180; Mechanical 13 "IN-" at 167.876,53.549 h1.27 r180; Mechanical 13 "IN+" at 167.876,41.3 h1.27 r180